# Altium PCB GPS-M2-NEO-M9N.PcbDoc
Units mm, origin at the board's own origin, x right, y up, seen from the top; angles counter-clockwise.
Board outline 22 x 42 mm, 4 copper layers (L01-Top Layer, L02-Inner Layer, L03-Inner Layer, L04-Bottom Layer), stack 0.76 mm thick; 40 components, 31 nets, 161 pads, 305 vias.
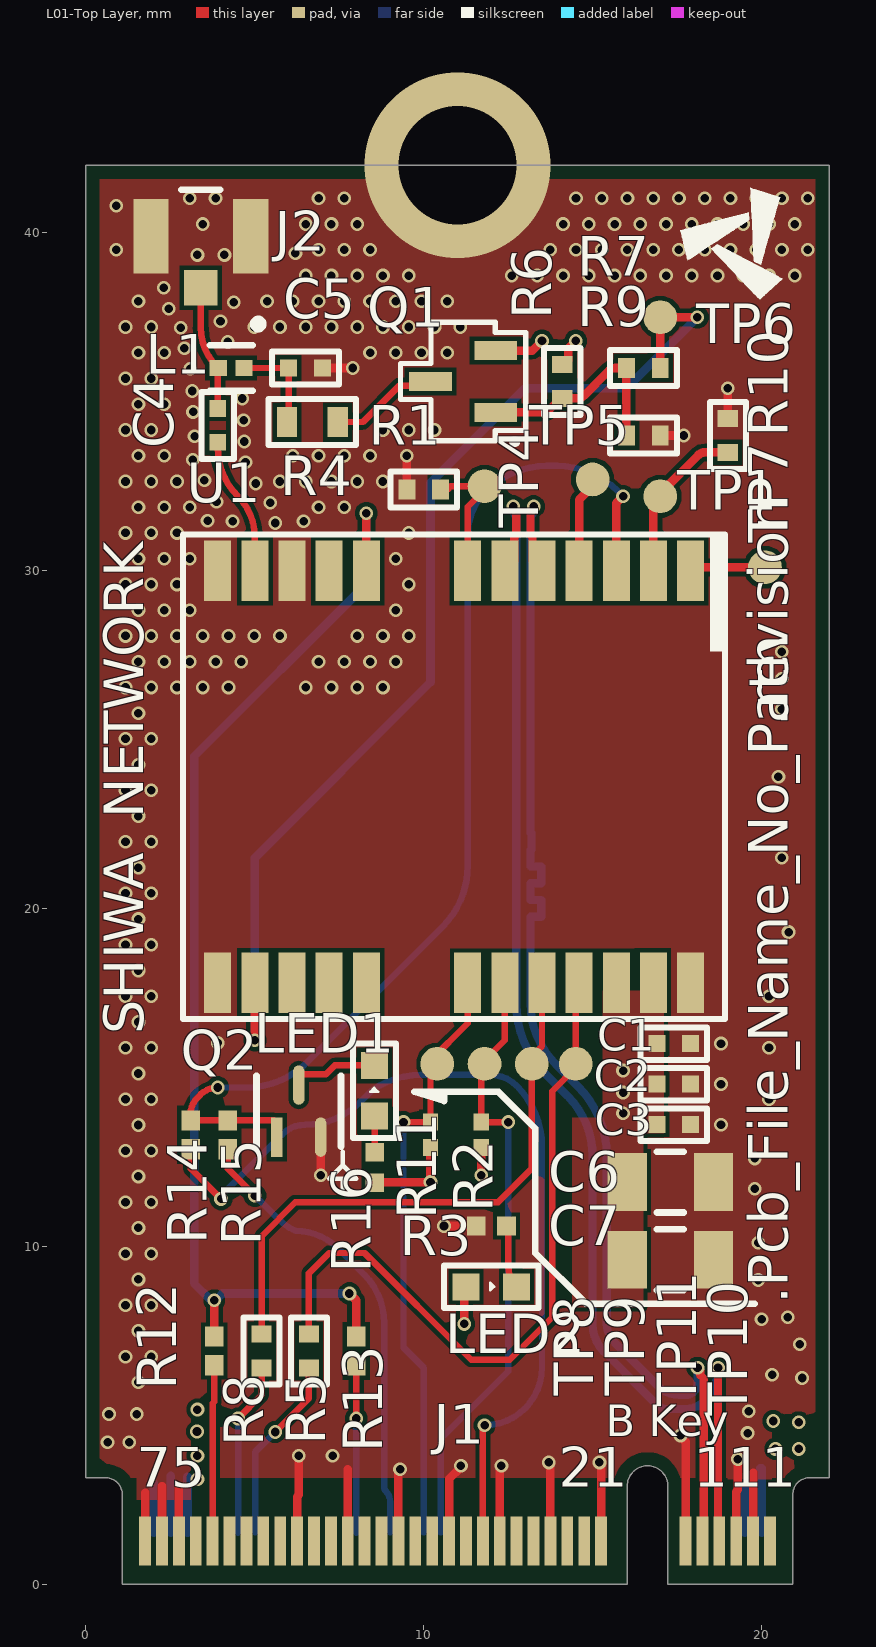
[diagram p0: L01-Top Layer view]
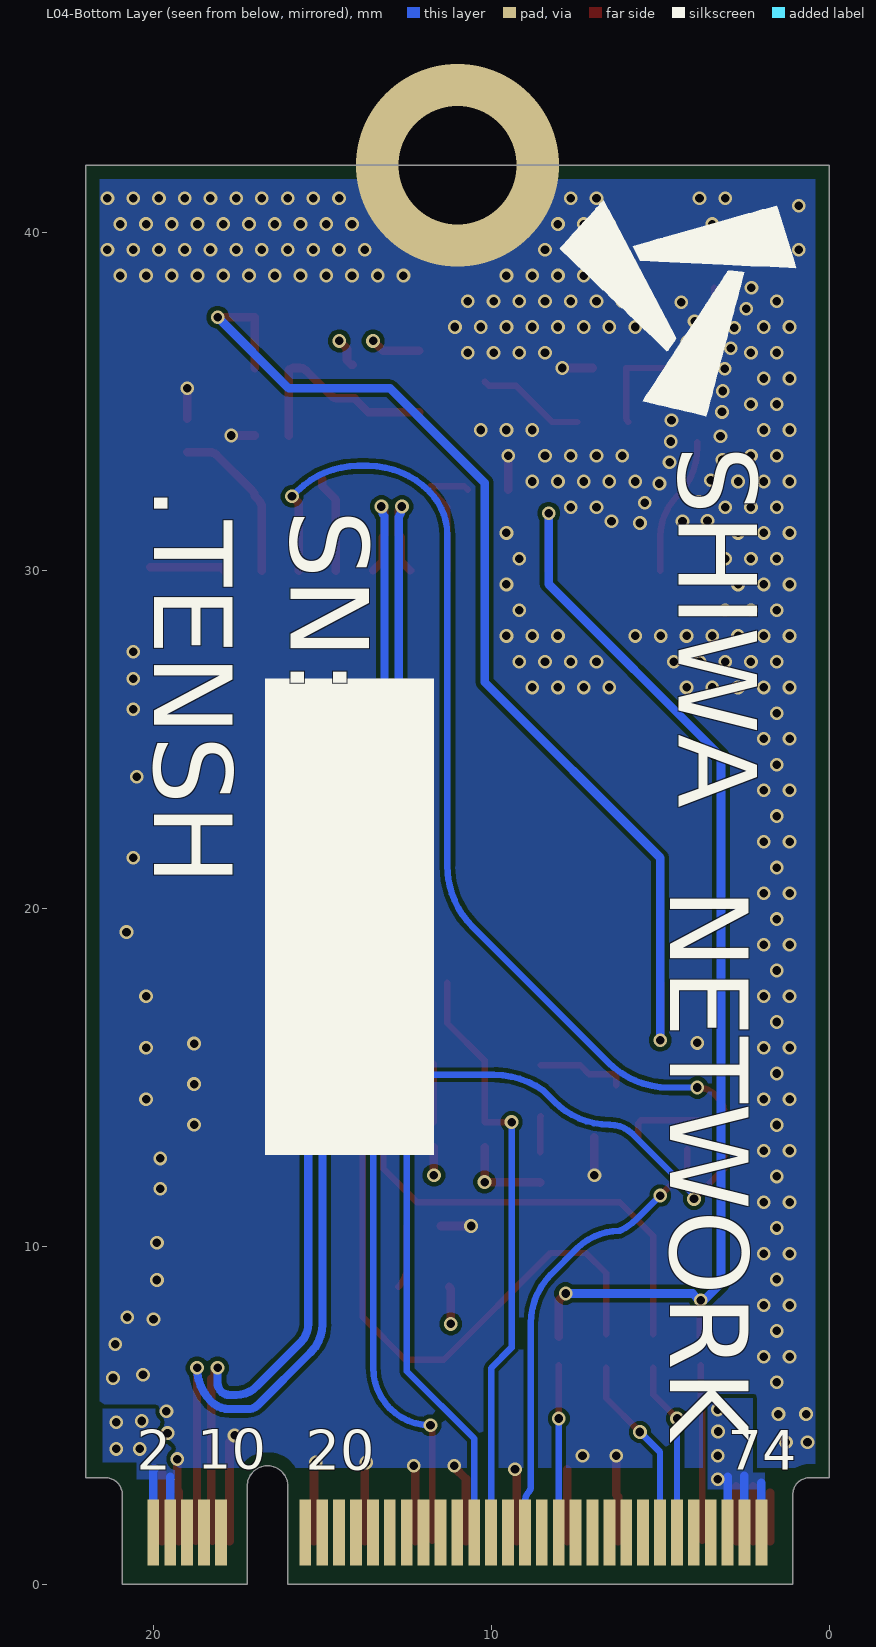
[diagram p1: L04-Bottom Layer view, seen from below]
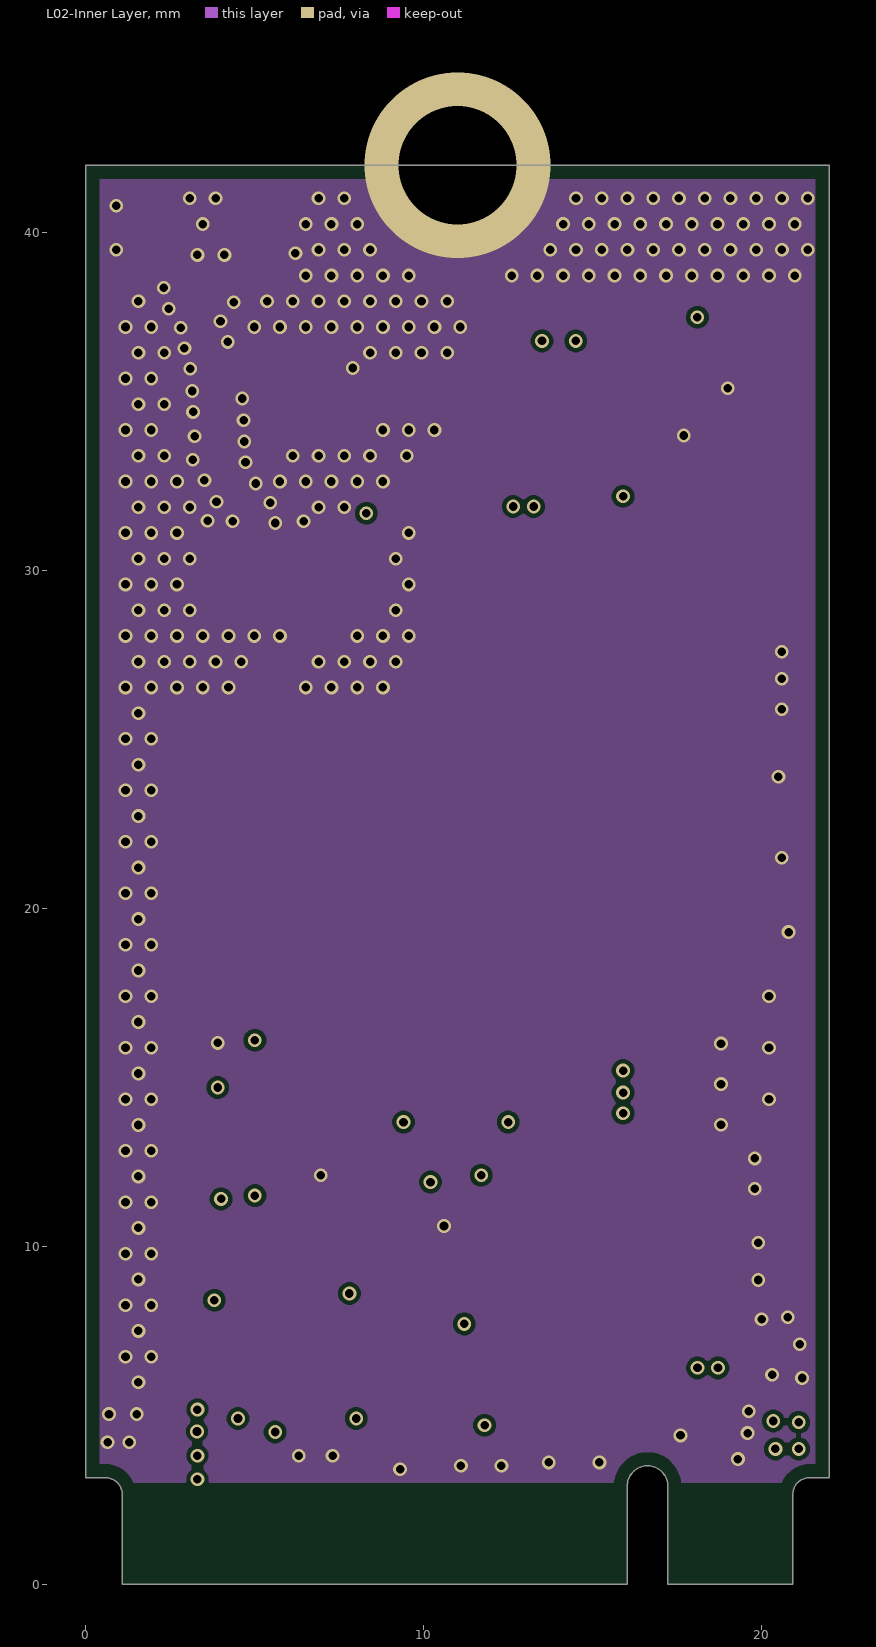
[diagram p2: L02-Inner Layer]
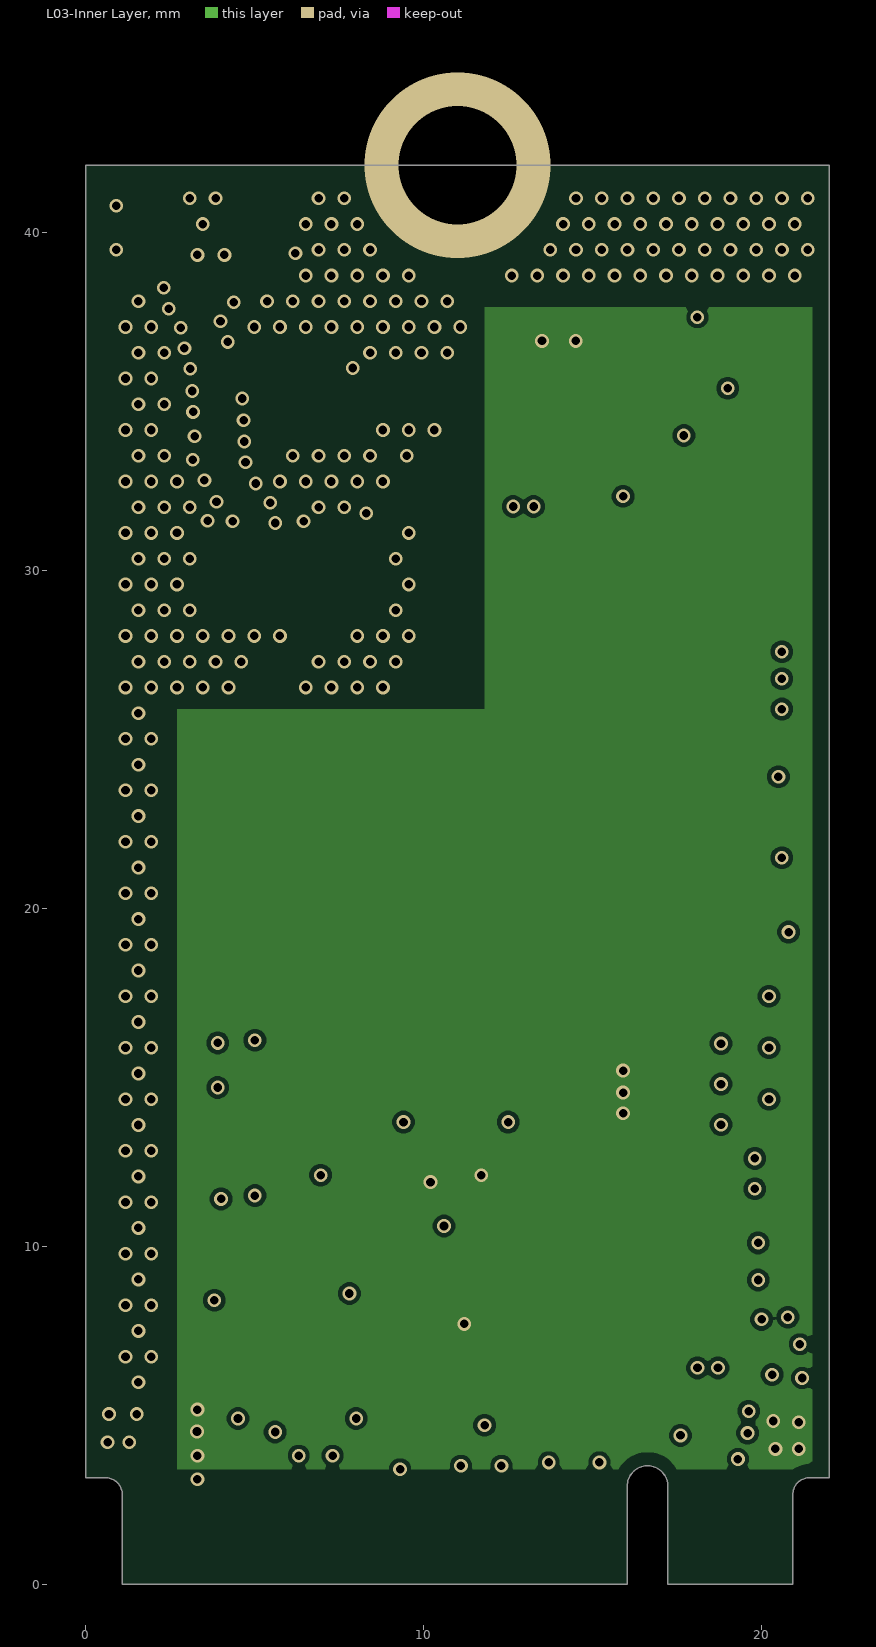
[diagram p3: L03-Inner Layer]
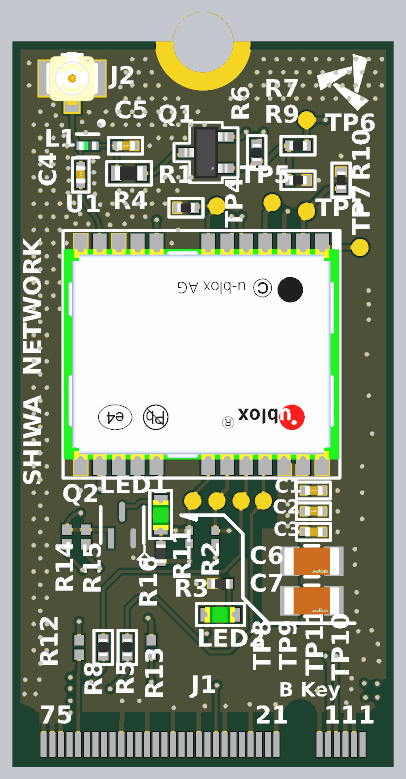
[diagram p4: 3D render of the assembled board from above, using the file's embedded part models]

## Layer stack, top to bottom
Top Solder: solder mask 0.0152, Solder Resist, Dk 3.9
L01-Top Layer: signal copper 0.035
Dielectric 1: prepreg 0.11, 2116, Dk 3.7
L02-Inner Layer: signal copper 0.035
Dielectric 2: core 0.4, FR4, Dk 4.04
L03-Inner Layer: signal copper 0.035
Dielectric 3: prepreg 0.11, 2116, Dk 3.7
L04-Bottom Layer: signal copper 0.035
Bottom Solder: solder mask 0.0152, Solder Resist, Dk 3.9

## Board outline
1.075,0 1.075,2.65 ccw(c0.575,2.65) 0.575,3.15 0,3.15 0,42 22,42 22,3.15 21.425,3.15 ccw(c21.425,2.65) 20.925,2.65 20.925,0 17.225,0 17.225,2.9 ccw(c16.625,2.9) 16.025,2.9 16.025,0

## Design rules (kind name [scope] priority, off if disabled: settings)
AcuteAngle [All] p1: minimum=6.00000000000000E+0001 checktracksonly=FALSE
BoardOutlineClearance [All] p1: gap=0.4 ignorepadtopadclearanceinfootprint=FALSE
Clearance Clearance_L1andL4_Copper [(InPolygon AND (OnLayer('Top Layer') OR OnLayer('Bottom Layer'))) vs (InDifferentialPairClass('All Differential Pairs'))] p1: gap=0.127 ignorepadtopadclearanceinfootprint=FALSE
Clearance [All] p2: gap=0.127 ignorepadtopadclearanceinfootprint=FALSE
ComponentClearance [All] p1: gap=0.4 collisioncheckmode=3 verticalgap=0.5 showdistances=FALSE
DiffPairsRouting 90_Ohm_L1andL4 [InDifferentialPairClass('90_Ohm')] p1: maxlimit=0.178 minlimit=0.178 mostfreqgap=0.178 toplayer_minwidth=0.241 toplayer_maxwidth=0.241 toplayer_prefwidth=0.241 midlayer1_minwidth=0.241 midlayer1_maxwidth=0.241 midlayer1_prefwidth=0.241 midlayer2_minwidth=0.241 midlayer2_maxwidth=0.241 midlayer2_prefwidth=0.241 bottomlayer_minwidth=0.241 bottomlayer_maxwidth=0.241 bottomlayer_prefwidth=0.241 maxuncoupledlength=5.08
DiffPairsRouting 100_Ohm_L1andL4 [InDifferentialPairClass('100_Ohm')] p2: maxlimit=0.178 minlimit=0.178 mostfreqgap=0.178 toplayer_minwidth=0.203 toplayer_maxwidth=0.203 toplayer_prefwidth=0.203 midlayer1_minwidth=0.203 midlayer1_maxwidth=0.203 midlayer1_prefwidth=0.203 midlayer2_minwidth=0.203 midlayer2_maxwidth=0.203 midlayer2_prefwidth=0.203 bottomlayer_minwidth=0.203 bottomlayer_maxwidth=0.203 bottomlayer_prefwidth=0.203 maxuncoupledlength=5.08
DiffPairsRouting 100_Ohm_Default [All] p3: maxlimit=0.254 minlimit=0.241 mostfreqgap=0.254 toplayer_maxgap=0.241 toplayer_prefgap=0.241 toplayer_minwidth=0.114 toplayer_maxwidth=0.114 toplayer_prefwidth=0.114 midlayer1_mingap=0.254 midlayer1_minwidth=0.381 midlayer1_maxwidth=0.381 midlayer1_prefwidth=0.381 midlayer2_mingap=0.254 midlayer2_minwidth=0.381 midlayer2_maxwidth=0.381 midlayer2_prefwidth=0.381 bottomlayer_maxgap=0.241 bottomlayer_prefgap=0.241 bottomlayer_minwidth=0.114 bottomlayer_maxwidth=0.114 bottomlayer_prefwidth=0.114 maxuncoupledlength=5.08
HoleSize [All] p1: absolutevalues=TRUE maxlimit=3 minlimit=0.15 maxpercent=80.000 minpercent=20.000
HoleToHoleClearance [All] p1: gap=0.3 allowstackedmicrovias=TRUE
MatchedLengths [InDifferentialPairClass('All Differential Pairs')] p1: tolerance=0.025 checknetsindiffpair=TRUE checkdiffpairvsdiffpair=FALSE checkxsignals=FALSE checkothers=FALSE
MinimumSolderMaskSliver [All] p1: minsoldermaskwidth=0.1 // 0.076mm for Green Soldermask, 0.1 for other color soldermask
PlaneClearance [All] p1: clearance=0.254
PolygonConnect [All] p1: connectstyle=Direct reliefconductorwidth=0.508 reliefentries=4 polygonreliefangle="90 Angle" airgapwidth=0.254
RoomDefinition 01-M2_NEO-M9N_MODULE [InComponentClass('01-M2_NEO-M9N_MODULE')] p1: confinementstyle=ConfineIn formatcopy=TRUE lockcomponents=FALSE outline 0.799,5.4 21.099,5.4 21.099,41.9 0.799,41.9
RoutingCorners [All] p1: cornerstyle=45-Degree minsetback=2.5 maxsetback=2.5
RoutingVias [All] p1: holewidth=0.254 width=0.406 viastyle="Through Hole" minholewidth=0.254 minwidth=0.406 maxholewidth=0.3 maxwidth=0.6
SilkToSilkClearance [All] p1: silktosilkclearance=0.1
SilkToSolderMaskClearance [IsPad] p1: minsilkscreentomaskgap=0.127 clearancetoexposedcopper=TRUE
SolderMaskExpansion [All] p1: expansion=0.05 istentingtop=FALSE
UnRoutedNet [All] p1: checkbadconnections=TRUE
Width [All] p1: maxlimit=2.54 minlimit=0.152 preferedwidth=0.191
20 further rules are at their usual default settings.

## Classes and differential pairs
component class 02-M2_GoldFingers: C6 C7 J1 R12 R13 R14 R15
component class 01-M2_NEO-M9N_MODULE: C1 C2 C3 C4 C5 J2 L1 LED1 LED2 Q1 Q2 R1 R2 R3 R4 R5 R6 R7 R8 R9 R10 R11 R16 TP1 TP4 TP5 TP6 TP7 TP8 TP9 TP10 TP11 U1

## Components (designator, comment, footprint, x,y, rotation, side; value= is the part's Value field where it differs from the comment)
C1 "1uF 6V3 0402" c0402 17.4,16 r180 top
C2 "100nF 10V 0402" c0402 17.4,14.8 r180 top
C3 "10nF 50V 0402" c0402 17.4,13.6 r180 top
C4 "47pF 50V 0402" c0402 3.9,34.3 r270 top
C5 "10nF 50V 0402" c0402 6.5,36 r180 top
C6 "47uF_6.3V_1206" FP-GRM31C-0_2-e0_3_0_8-IPC_C 17.3,11.9 r0 top
C7 "47uF_6.3V_1206" FP-GRM31C-0_2-e0_3_0_8-IPC_C 17.3,9.6 r0 top
J1 "OCPTAP_M2_FINGERS" "OCPTAP M2 FINGERS" 20.25,1.275 r0 top locked
J2 "U.FL-R-SMT-1(10)" FP-U_FL-R-SMT-1_10-MFG 3.4,39.9 r180 top
L1 "27nH 350mA 0.46ohm 0402" FP-LQG15HH_02-IPC_C 4.3,36 r180 top
LED1 "Green" led0603 8.538,14.604 r90 top
LED2 "Green" led0603 12,8.8 r0 top
Q1 "DMG2302UKQ-7" SOT23 11.165,35.6 r90 top
Q2 "2N7002W" FP-419AB-01-IPC_C 6.3,14 r90 top
R1 "0 ohm 0402" r0402 10,32.4 r180 top
R2 "10K_5%_0402" RESC1005X40X25LL05T10 11.7,13.3 r270 top
R3 "1K_1%_0402" RESC1005X40X25NL05T05 12,10.6 r0 top
R4 "10 OHM 1/4W 0603" r0603 6.7,34.4 r180 top
R5 "0 ohm 0402" r0402 6.6,6.9 r270 top
R6 "DNI 0 ohm 0402" r0402 14.1,35.6 r90 top
R7 "0 ohm 0402" r0402 16.5,36 r180 top
R8 "0 ohm 0402" r0402 5.2,6.9 r270 top
R9 "DNI 0 ohm 0402" r0402 16.5,34 r0 top
R10 "DNI 0 ohm 0402" r0402 19,34 r270 top
R11 "10K_5%_0402" RESC1005X40X25LL05T10 10.2,13.3 r270 top
R12 "0_5%_0402" RESC1005X40X25NL05T10 3.8,6.9 r270 top
R13 "0_5%_0402" RESC1005X40X25NL05T10 8,6.9 r270 top
R14 "DNI_0_5%_0402" RESC1005X40X25NL05T10 3.1,13.3 r90 top
R15 "0_5%_0402" RESC1005X40X25NL05T10 4.2,13.3 r90 top
R16 "1K_1%_0402" RESC1005X40X25NL05T05 8.552,12.336 r270 top
TP1 "1MM" TP1MM 17,32.2 r0 top
TP4 "1MM" TP1MM 11.8,32.5 r0 top
TP5 "1MM" TP1MM 15,32.7 r0 top
TP6 "1MM" TP1MM 17,37.5 r0 top
TP7 "1MM" TP1MM 20.1,30.1 r0 top
TP8 "1MM" TP1MM 10.4,15.4 r0 top
TP9 "1MM" TP1MM 11.8,15.4 r0 top
TP10 "1MM" TP1MM 14.5,15.4 r90 top
TP11 "1MM" TP1MM 13.2,15.4 r90 top
U1 "NEO-M9N-00B" IC_NEO-M9N 10.9,23.9 r90 top

## Footprints (in the part's own frame and the unit in brackets; to place one, negate y for a bottom-side part, rotate by r counter-clockwise, add the part's x,y. Pads: shape width x height; smd on the part's side, far side on the other; paste and mask are expansions set on the pad)
c0402 [mm]
  rect 0.5x0.5 smd: 1(-0.5,0) 2(0.5,0)
  silkscreen extent -0.99,-0.48 0.99,0.48, body extent -0.55,-0.28 0.5,0.27, height 0.56
FP-419AB-01-IPC_C [mm]
  rect 1.164x0.336 smd paste+0 mask+0: 1(-0.77,0.65)
  rrect100% 1.164x0.336 smd paste+0 mask+0: 2(-0.77,-0.65) 3(0.77,0)
  silkscreen extent -1.05,-1.25 1.05,1.25
FP-GRM31C-0_2-e0_3_0_8-IPC_C [mm]
  rect 1.155x1.706 smd paste+0 mask+0: 1(-1.276,0) 2(1.276,0)
  silkscreen extent -0.4,-0.9 0.4,0.9, body extent -1.95,-1 1.95,1, height 0.25
FP-LQG15HH_02-IPC_C [mm]
  rect 0.515x0.472 smd paste+0 mask+0: 1(-0.379,0) 2(0.379,0)
  silkscreen extent -0.93,-1.42 0.64,0.67, body extent -0.74,-0.38 0.74,0.38, height 0.25
FP-U_FL-R-SMT-1_10-MFG [mm]
  rect 1x1.05 smd paste-1000 mask+0: 1(0,1.525)
  rect 1.05x2.2 smd paste-1000 mask+0: 2(-1.475,0) 3(1.475,0)
  silkscreen extent -0.58,-1.38 0.58,-1.38, body extent -2.1,-1.48 2.1,2.15, height 0.25
IC_NEO-M9N [mil]
  rect 70.8x31.5 smd paste-99999: 1(240.15,-275.55) 2(240.15,-232.25) 3(240.15,-188.95) 4(240.15,-145.65) 5(240.15,-102.35) 6(240.15,-59.05) 7(240.15,-15.75) 8(240.15,102.35) 9(240.15,145.65) 10(240.15,188.95) 11(240.15,232.25) 12(240.15,275.55) 13(-240.15,275.55) 14(-240.15,232.25) 15(-240.15,188.95) 16(-240.15,145.65) 17(-240.15,102.35) 18(-240.15,-15.75) 19(-240.15,-59.05) 20(-240.15,-102.35) 21(-240.15,-145.65) 22(-240.15,-188.95) 23(-240.15,-232.25) 24(-240.15,-275.55)
  silkscreen extent -282,-316 282,316, body extent -240,-315 240,315, height 91
led0603 [mm]
  rect 0.8x0.8 smd: 1(-0.75,0) 2(0.75,0)
  silkscreen extent -1.4,-0.64 1.4,0.64, body extent -0.88,-0.44 0.82,0.46, height 0.9
"OCPTAP M2 FINGERS" [mm]
  rect 0.35x1.45 smd: 1(0,0) 3(-0.5,0) 5(-1,0) 7(-1.5,0) 9(-2,0) 11(-2.5,0) 21(-5,0) 23(-5.5,0) 25(-6,0) 27(-6.5,0) 29(-7,0) 31(-7.5,0) 33(-8,0) 35(-8.5,0) 37(-9,0) 39(-9.5,0) 41(-10,0) 43(-10.5,0) 45(-11,0) 47(-11.5,0) 49(-12,0) 51(-12.5,0) 53(-13,0) 55(-13.5,0) 57(-14,0) 59(-14.5,0) 61(-15,0) 63(-15.5,0) 65(-16,0) 67(-16.5,0) 69(-17,0) 71(-17.5,0) 73(-18,0) 75(-18.5,0)
  rect 0.35x1.95 smd far side: 2(-0.244,0.25) 4(-0.744,0.25) 6(-1.244,0.25) 8(-1.744,0.25) 10(-2.244,0.25) 20(-4.744,0.25) 22(-5.244,0.25) 24(-5.744,0.25) 26(-6.244,0.25) 28(-6.744,0.25) 30(-7.244,0.25) 32(-7.744,0.25) 34(-8.244,0.25) 36(-8.744,0.25) 38(-9.244,0.25) 40(-9.744,0.25) 42(-10.244,0.25) 44(-10.744,0.25) 46(-11.244,0.25) 48(-11.744,0.25) 50(-12.244,0.25) 52(-12.744,0.25) 54(-13.244,0.25) 56(-13.744,0.25) 58(-14.244,0.25) 60(-14.744,0.25) 62(-15.244,0.25) 64(-15.744,0.25) 66(-16.244,0.25) 68(-16.744,0.25) 70(-17.244,0.25) 72(-17.744,0.25) 74(-18.244,0.25)
r0402 [mm]
  rect 0.5x0.6 smd: 1(-0.5,0) 2(0.5,0)
  silkscreen extent -0.99,-0.53 0.99,0.53, body extent -0.5,-0.25 0.5,0.25, height 0.36
r0603 [mm]
  rect 0.6x0.9 smd: 1(-0.75,0) 2(0.75,0)
  silkscreen extent -1.3,-0.69 1.3,0.69, body extent -0.79,-0.4 0.81,0.4, height 0.46
RESC1005X40X25LL05T10 [mm] "Chip Resistor, 2-Leads, Body 1.00x0.50mm, IPC High Density"
  rect 0.5x0.45 smd: 1(-0.375,0) 2(0.375,0)
  body extent -0.53,-0.27 0.53,0.28, height 0.4
RESC1005X40X25NL05T05 [mm] "Chip Resistor, 2-Leads, Body 1.05x0.55mm, IPC Medium Density"
  rect 0.55x0.55 smd: 1(-0.45,0) 2(0.45,0)
  body extent -0.53,-0.28 0.53,0.28, height 0.4
RESC1005X40X25NL05T10 [mm] "Chip Resistor, 2-Leads, Body 1.00x0.50mm, IPC Medium Density"
  rect 0.6x0.55 smd: 1(-0.425,0) 2(0.425,0)
  body extent -0.53,-0.27 0.53,0.28, height 0.4
SOT23 [mil]
  rect 22x50 smd: 1(-36.02,-38) 2(36.02,-38) 3(0,38)
  silkscreen extent -73,-73 69,73, body extent -59,-49 59,49, height 43
TP1MM [mm] "Test Point 1MM diameter"
  round 1 smd paste-100: 1(0,0)

## Part data
C1: library part "CAP CER 1UF 6.3V X7R 0402", "0402 1 uF 6.3 V ±10% Tolerance X7R Multilayer Ceramic Capacitor", Capacitance=1uF, Case Code (Imperial)=0402, Case Code (Metric)=1005, Dielectric=X7R, Manufacturer=Murata, Manufacturer Part Number=GRM155R70J105KA12J, Max Operating Temperature=125°C, Min Operating Temperature=-55°C, Package Quantity=50000, Supplier Part Number 1=490-13339-1-ND, Tolerance=10%, Voltage Rating=6.3V, Case/Package=0402, CATEGORY="Ceramic Capacitors", componentlink1description=http://www.mouser.com/ds/2/281/c02e-2905.pdf?src-supplier=Mouser, componentlink1url=http://www.mouser.com/ds/2/281/c02e-2905.pdf?src-supplier=Mouser, componentlink2description=http://search.murata.co.jp/Ceramy/image/img/A01X/G101/ENG/GRM155R70J105KA12-01.pdf?src-supplier=Digi-Key, componentlink2url=http://search.murata.co.jp/Ceramy/image/img/A01X/G101/ENG/GRM155R70J105KA12-01.pdf?src-supplier=Digi-Key, Length=0.039inch, Mount="Surface Mount", packaging="Tape and Reel", Pricing 1="1=0.10000, 10=0.07300, 50=0.04000, 100=0.03270, 500=0.02334, 1000=0.01833, 2500=0.01666, 5000=0.01533 (USD)", RoHS=Yes, RoHS Compliant=Yes, Stock 1=7275801, Supplier 1=Digi-Key, Termination=SMD/SMT, Thickness=0.022inch, Voltage Rating (DC)=6.3V, Weight=0.000212oz, Width=0.02inch
C2: library part "CAP CER 0.1UF 10V X7R 0402", "CL05 Series 0.1 uF 10 V ±10 % Tolerance X7R SMT Multilayer Ceramic Capacitor", Capacitance=100nF, Case Code (Imperial)=0402, Case Code (Metric)=1005, Dielectric=X7R, Manufacturer=Samsung, Manufacturer Part Number=CL05B104KP5NNNC, Max Operating Temperature=125°C, Min Operating Temperature=-55°C, Package Quantity=1, Supplier Part Number 1=1276-1002-1-ND, Tolerance=10%, Voltage Rating=10V, Case/Package=0402, CATEGORY="Ceramic Capacitors", componentlink1description=https://datasheet.ciiva.com/15165/getdatasheetpartid-37100-15165107.pdf?src-supplier=Verical, componentlink1url=https://datasheet.ciiva.com/15165/getdatasheetpartid-37100-15165107.pdf?src-supplier=Verical, componentlink2description=https://datasheet.ciiva.com/16498/cl05b104kq5nnnc-16498491.pdf?src-supplier=Future+Electronics, componentlink2url=https://datasheet.ciiva.com/16498/cl05b104kq5nnnc-16498491.pdf?src-supplier=Future+Electronics, Construction=Flat, Contact Plating=Tin, Depth=0.5mm, Height=0.5mm, Length=1mm, Mount="Surface Mount", packaging="Tape and Reel", Pricing 1="1=0.10000, 10=0.02400, 50=0.01300, 100=0.01050, 500=0.00752, 1000=0.00592, 2500=0.00538, 5000=0.00495 (USD)", Radiation Hardening=No, RoHS=Yes, RoHS Compliant=Yes, series=CL, Stock 1=36338332, Supplier 1=Digi-Key, Thickness=0.022inch, Width=0.02inch
C3 C5: library part "CAP CER 10000PF 50V X7R 0402", "CAP CER 10000PF 50V X7R 0402", Capacitance=10nF, Case Code (Imperial)=0402, Case Code (Metric)=1005, Dielectric=X7R, Manufacturer=Murata, Manufacturer Part Number=GCM155R71H103KA55D, Max Operating Temperature=125°C, Min Operating Temperature=-55°C, Package Quantity=1, Ratings=AEC-Q200, Supplier Part Number 1=490-4762-1-ND, Tolerance=10%, Voltage=50V, Case/Package=0402, CATEGORY="Ceramic Capacitors", componentlink1description=https://datasheet.ciiva.com/130/product-130683.pdf?src-supplier=Digi-Key, componentlink1url=https://datasheet.ciiva.com/130/product-130683.pdf?src-supplier=Digi-Key, componentlink2description=https://datasheet.ciiva.com/130/product-130682.pdf?src-supplier=Digi-Key, componentlink2url=https://datasheet.ciiva.com/130/product-130682.pdf?src-supplier=Digi-Key, ComponentLink3Description=https://datasheet.ciiva.com/130/product-130684.pdf?src-supplier=Digi-Key, ComponentLink3URL=https://datasheet.ciiva.com/130/product-130684.pdf?src-supplier=Digi-Key, ComponentLink4Description=https://datasheet.ciiva.com/11787/0900766b80ef92d0-11787082.pdf?src-supplier=RSComponents, ComponentLink4URL=https://datasheet.ciiva.com/11787/0900766b80ef92d0-11787082.pdf?src-supplier=RSComponents, ComponentLink5Description=https://datasheet.ciiva.com/16199/product-16199584.pdf?src-supplier=Future+Electronics, ComponentLink5URL=https://datasheet.ciiva.com/16199/product-16199584.pdf?src-supplier=Future+Electronics, ComponentLink6Description=https://datasheet.ciiva.com/18100/getdatasheetpartid-27433-18100656.pdf?src-supplier=Verical, ComponentLink6URL=https://datasheet.ciiva.com/18100/getdatasheetpartid-27433-18100656.pdf?src-supplier=Verical, ComponentLink7Description=https://datasheet.ciiva.com/2989/product-2989235.pdf?src-supplier=Avnet, ComponentLink7URL=https://datasheet.ciiva.com/2989/product-2989235.pdf?src-supplier=Avnet, Construction=Flat, Depth=0.5mm, Height=0.5mm, Lead Free="Lead Free", Length=1mm, Mount="Surface Mount", packaging="Tape and Reel", Pricing 1="1=0.10000, 10=0.02700, 50=0.01460, 100=0.01190, 500=0.00848, 1000=0.00667, 2500=0.00606, 5000=0.00558 (USD)", Radiation Hardening=No, REACH SVHC="No SVHC", RoHS=Yes, RoHS Compliant=Yes, series=GCM, Stock 1=16109194, Supplier 1=Digi-Key, Termination=SMD/SMT, Thickness=0.022inch, Voltage Rating=50V, Voltage Rating (DC)=50V, Width=0.02inch
C4: library part "CAP CER 47PF 50V C0G/NPO 0402", "0402 47 pF 50 V ±5 % Tolerance NP0 SMT Multilayer Ceramic Capacitor", Capacitance=47pF, Case Code (Imperial)=0402, Case Code (Metric)=1005, Dielectric=C0G, Dielectric Material=Ceramic, Insulation Resistance=100GR, Manufacturer=Yageo, Manufacturer Part Number=CC0402JRNPO9BN470, Max Operating Temperature=125°C, Min Operating Temperature=-55°C, Package Quantity=1, Supplier Part Number 1=311-1021-1-ND, Tolerance=5%, Voltage=50V, Case/Package=0402, CATEGORY="Ceramic Capacitors", componentlink1description=https://datasheet.ciiva.com/28450/1443161-28450267.pdf?src-supplier=Element14, componentlink1url=https://datasheet.ciiva.com/28450/1443161-28450267.pdf?src-supplier=Element14, componentlink2description=https://datasheet.ciiva.com/8033/1443161-8033638.pdf?src-supplier=Element14, componentlink2url=https://datasheet.ciiva.com/8033/1443161-8033638.pdf?src-supplier=Element14, ComponentLink3Description=https://datasheet.ciiva.com/8033/1443161-8033637.pdf?src-supplier=Element14, ComponentLink3URL=https://datasheet.ciiva.com/8033/1443161-8033637.pdf?src-supplier=Element14, ComponentLink4Description=https://datasheet.ciiva.com/161/mlccorderingcode-161493.pdf?src-supplier=Digi-Key, ComponentLink4URL=https://datasheet.ciiva.com/161/mlccorderingcode-161493.pdf?src-supplier=Digi-Key, ComponentLink5Description=https://datasheet.ciiva.com/161/mlccorderingcode-161492.pdf?src-supplier=Digi-Key, ComponentLink5URL=https://datasheet.ciiva.com/161/mlccorderingcode-161492.pdf?src-supplier=Digi-Key, ComponentLink6Description=https://datasheet.ciiva.com/161/mlccorderingcode-161494.pdf?src-supplier=Digi-Key, ComponentLink6URL=https://datasheet.ciiva.com/161/mlccorderingcode-161494.pdf?src-supplier=Digi-Key, Depth=0.5mm, Height=0.5mm, Lead Free="Lead Free", Length=1mm, Mount="Surface Mount", Number of Pins=2, packaging="Tape and Reel", Pricing 1="1=0.10000, 10=0.01800, 50=0.01000, 100=0.00820, 500=0.00584, 1000=0.00458, 2500=0.00417, 5000=0.00383 (USD)", Radiation Hardening=No, REACH SVHC="No SVHC", Resistor Type=Ceramic, RoHS=Yes, RoHS Compliant=Yes, series=CC, Stock 1=4278982, Supplier 1=Digi-Key, Termination=SMD/SMT, Thickness=0.022inch, Voltage Rating=50V, Voltage Rating (DC)=50V, Weight=2.3E-05oz, Width=0.02inch
C6 C7: library part CMP-2000-06344-2, "Chip Multilayer Ceramic Capacitors for General Purpose, 1206, 47uF, X5R, 15%, 20%, 6.3V", Capacitance=47uF, Case Code (Imperial)=1206, Case Code (Metric)=3216, Dielectric=X5R, Max Operating Temperature=85°C, Min Operating Temperature=-55°C, Package Quantity=2000, Tolerance=20%, Voltage=6.3V, Case/Package=1206, Depth=1.6mm, Height=1.6mm, Lead Free="Lead Free", Length=3.2mm, Material=Ceramic, Mount="Surface Mount", packaging="Tape and Reel", Radiation Hardening=No, REACH SVHC="No SVHC", Termination=SMD/SMT, Thickness=0.071inch, Voltage Rating=6.3V, Voltage Rating (DC)=6.3V, Width=0.063inch
J2: library part CMP-2000-05152-3, "CONN U.FL RCPT STR 50 OHM SMD", Dielectric Material=Polymer, Frequency=6GHz, Housing Color=Beige, Insulation Resistance=500MR, Max Operating Temperature=90°C, Min Operating Temperature=-40°C, Package Quantity=2500, Body Material=Bronze, Body Plating=Silver, Connector Type=Coaxial, Contact Material=Brass, Contact Plating=Gold, Depth=3.1mm, Fastening Type=Snap, Gender=Male, Impedance=50R, Lead Free="Lead Free", Length=3mm, Max Frequency=6GHz, Mount="Surface Mount", Orientation=Straight, packaging="Cut Tape", Radiation Hardening=No, REACH SVHC="No SVHC", series=U.FL, Termination=Solder, Weight=0.001764oz, Wire/Cable Type=Coaxial
L1: library part CMP-2000-06578-2, "Multilayer type RF Inductor 27nH ±5% 0.46Ω 350mA 0402", Case Code (Imperial)=0402, Case Code (Metric)=1005, Current Rating=300mA, DC Resistance (DCR)=460mR, Inductance=27nH, Inductance Tolerance=5%, Manufacturer Part Number=LQG15HS27NJ02D, Max Operating Temperature=125°C, Min Operating Temperature=-55°C, Package Quantity=10000, Self Resonant Frequency=1.7GHz, Test Frequency=100MHz, Case/Package=0402, Core Material=Air, DC Current=300mA, Depth=0.55mm, Height=0.5mm, Height - Seated (Max)=0.022inch, Lead Free="Lead Free", Length=1mm, Max DC Current=300mA, Military Standard=Not, Mount="Surface Mount", packaging="Tape and Reel", Q Factor=8, REACH SVHC="No SVHC", Shielding=Unshielded, Termination=SMD/SMT, Tolerance=5%, Width=0.02inch
LED1 LED2: library part "LED GREEN CLEAR CHIP SMD", "LED High-Power Uni-Color Green 574nm 2-Pin Chip LED T/R", Case Code (Imperial)=0603, Case Code (Metric)=1608, Forward Current=30mA, Forward Voltage=2V, Lens Color=Colorless, Manufacturer="Vishay Lite-On", Manufacturer Part Number=LTST-C190KGKT, Max Operating Temperature=85°C, Min Operating Temperature=-55°C, Package Quantity=1, Power Dissipation=75mW, Reverse Voltage=5V, Supplier Part Number 1=160-1435-1-ND, Test Current=20mA, Case/Package=0603, CATEGORY=LEDs, Color=Green, componentlink1description=https://datasheet.ciiva.com/11774/0900766b80dc02a8-11774060.pdf?src-supplier=RSComponents, componentlink1url=https://datasheet.ciiva.com/11774/0900766b80dc02a8-11774060.pdf?src-supplier=RSComponents, componentlink2description=https://datasheet.ciiva.com/12403/100-ltst-c190kgkt-63268-12403899.pdf?src-supplier=Mouser, componentlink2url=https://datasheet.ciiva.com/12403/100-ltst-c190kgkt-63268-12403899.pdf?src-supplier=Mouser, ComponentLink3Description=https://datasheet.ciiva.com/15117/getdatasheetpartid-141494-15117731.pdf?src-supplier=Verical, ComponentLink3URL=https://datasheet.ciiva.com/15117/getdatasheetpartid-141494-15117731.pdf?src-supplier=Verical, ComponentLink4Description=https://datasheet.ciiva.com/2109/s-110-ltst-c190kgkt-2109989.pdf?src-supplier=Digi-Key, ComponentLink4URL=https://datasheet.ciiva.com/2109/s-110-ltst-c190kgkt-2109989.pdf?src-supplier=Digi-Key, ComponentLink5Description=https://datasheet.ciiva.com/2109/s-110-ltst-c190kgkt-2109988.pdf?src-supplier=Digi-Key, ComponentLink5URL=https://datasheet.ciiva.com/2109/s-110-ltst-c190kgkt-2109988.pdf?src-supplier=Digi-Key, ComponentLink6Description=https://datasheet.ciiva.com/2109/s-110-ltst-c190kgkt-2109990.pdf?src-supplier=Digi-Key, ComponentLink6URL=https://datasheet.ciiva.com/2109/s-110-ltst-c190kgkt-2109990.pdf?src-supplier=Digi-Key, Depth=0.8mm, Dominant Wavelength=571nm, Height=0.8mm, Illumination Color=Green, Lead Free="Lead Free", Length=1.6mm, Lens Style=Diffused,Colorless,Rectangular,Clear, Lens Transparency=Clear, Luminous Intensity=35mcd, Mount="Surface Mount", Number of Elements=1, Number of LEDs=1, Number of Pins=2, packaging="Tape and Reel", Power Rating=75mW, Pricing 1="1=0.24000, 10=0.13200, 100=0.06110, 500=0.05640, 1000=0.04418, 2000=0.04324 (USD)", Radiation Hardening=No, RoHS=Yes, RoHS Compliant=Yes, Stock 1=1803324, Supplier 1=Digi-Key, Viewing Angle=130°, Wavelength=574nm, Width=0.8mm
Q1: "N-Channel 20 V 2.8A (Ta) 660mW (Ta) Surface Mount SOT-23-3", Case/Package=SOT-23, Continuous Drain Current (ID)=2.8A, Drain to Source Voltage (Vdss)=20V, Input Capacitance=130pF, Manufacturer=Diodes, Max Operating Temperature=150°C, Max Power Dissipation=660mW, Mfr_Name="Diodes Inc", Min Operating Temperature=-55°C, Supplier Part Number 1=31-DMG2302UKQ-7CT-ND, Copyright="Copyright (C) 2022 Ultra Librarian. All rights reserved.", Digi-Key_Part_Number_1=31-DMG2302UKQ-7TR-ND, Digi-Key_Part_Number_2=31-DMG2302UKQ-7CT-ND, Digi-Key_Part_Number_3=31-DMG2302UKQ-7DKR-ND, Manufacturer Part Number=DMG2302UKQ-7, Manufacturer_Part_Number=DMG2302UKQ-7, Mount="Surface Mount", packaging="Tape and Reel", Pricing 1="1=0.48000, 10=0.36000, 100=0.22400, 500=0.15330, 1000=0.11792 (USD)", Rds On Max=90mR, RefDes=RefDes, RoHS=Yes, Stock 1=997695, Supplier 1=Digi-Key, Type=DEV
Q2: library part CMP-07173-000098-1, "MOSFET N-CH 60V 115MA SOT-323", Case/Package=SOT-323, Continuous Drain Current (ID)=115mA, Drain to Source Breakdown Voltage=60V, Drain to Source Resistance=7.5R, Gate to Source Voltage (Vgs)=20V, Input Capacitance=50pF, Max Operating Temperature=150°C, Max Power Dissipation=200mW, Min Operating Temperature=-55°C, Package Quantity=1, Threshold Voltage=1.76V, Contact Plating=Tin, Drain to Source Voltage (Vdss)=60V, Element Configuration=Single, Height=1mm, Lead Free="Lead Free", Length=2mm, Mount="Surface Mount", Number of Elements=1, Number of Pins=3, On-State Resistance=7.5R, packaging="Tape and Reel", Power Dissipation=200mW, Radiation Hardening=No, Rds On Max=7.5R, REACH SVHC="No SVHC", Turn-Off Delay Time=12.5ns, Turn-On Delay Time=5.85ns, Weight=0.03g, Width=1.25mm
R1 R5 R6 R7 R8 R9 R10: library part "RES 0 OHM JUMPER 1/16W 0402", "RES SMD 0 OHM JUMPER 1/16W 0402", Case Code (Imperial)=0402, Case Code (Metric)=1005, Manufacturer=Yageo, Manufacturer Part Number=RC0402JR-070RL, Max Operating Temperature=155°C, Max Power Dissipation=63mW, Min Operating Temperature=-55°C, Package Quantity=1, Power Rating=62.5mW, Resistance=0mR, Resistance Tolerance=5%, Resistor Type="Thick Film", Supplier Part Number 1=311-0.0JRCT-ND, Temperature Coefficient=200ppm/°C, Voltage Rating=50V, Case/Package=0402, CATEGORY="Chip SMD Resistors", componentlink1description=https://datasheet.ciiva.com/2452/pyu-rc0402-51-rohs-l-6-2452608.pdf?src-supplier=Digi-Key, componentlink1url=https://datasheet.ciiva.com/2452/pyu-rc0402-51-rohs-l-6-2452608.pdf?src-supplier=Digi-Key, componentlink2description=https://datasheet.ciiva.com/11808/0900766b80c66297-11808195.pdf?src-supplier=RSComponents, componentlink2url=https://datasheet.ciiva.com/11808/0900766b80c66297-11808195.pdf?src-supplier=RSComponents, ComponentLink3Description=https://datasheet.ciiva.com/7983/1018594-7983535.pdf?src-supplier=Element14, ComponentLink3URL=https://datasheet.ciiva.com/7983/1018594-7983535.pdf?src-supplier=Element14, ComponentLink4Description=https://datasheet.ciiva.com/22747/1018594-22747515.pdf?src-supplier=Element14, ComponentLink4URL=https://datasheet.ciiva.com/22747/1018594-22747515.pdf?src-supplier=Element14, ComponentLink5Description=https://datasheet.ciiva.com/2452/pyu-r-int-thick-7-2452609.pdf?src-supplier=Digi-Key, ComponentLink5URL=https://datasheet.ciiva.com/2452/pyu-r-int-thick-7-2452609.pdf?src-supplier=Digi-Key, ComponentLink6Description=https://datasheet.ciiva.com/2452/pyu-r-int-thick-7-2452610.pdf?src-supplier=Digi-Key, ComponentLink6URL=https://datasheet.ciiva.com/2452/pyu-r-int-thick-7-2452610.pdf?src-supplier=Digi-Key, ComponentLink7Description=https://datasheet.ciiva.com/8896/pyu-rc0402-51-rohs-l-6-8896201.pdf?src-supplier=Avnet, ComponentLink7URL=https://datasheet.ciiva.com/8896/pyu-rc0402-51-rohs-l-6-8896201.pdf?src-supplier=Avnet, ComponentLink8Description=https://datasheet.ciiva.com/15189/getdatasheetpartid-326379-15189533.pdf?src-supplier=Verical, ComponentLink8URL=https://datasheet.ciiva.com/15189/getdatasheetpartid-326379-15189533.pdf?src-supplier=Verical, Construction=Rectangular, Contact Plating=Tin,Matte, Depth=0.5mm, Features="Moisture Resistant", Height=0.016inch, Lead Free="Lead Free", Length=1mm, Military Standard=Not, Number of Terminations=2, packaging="Tape and Reel", Pricing 1="1=0.10000, 10=0.01200, 25=0.00840, 50=0.00640, 100=0.00480, 250=0.00364, 500=0.00290, 1000=0.00214, 5000=0.00154 (USD)", Radiation Hardening=No, REACH SVHC=Unknown, RoHS=Yes, RoHS Compliant=Yes, series=RC, Size Code=0402, Stock 1=45165868, Supplier 1=Digi-Key, Technology="THICK FILM", Termination=SMD/SMT, Tolerance=5%, Width=0.02inch
R2 R11: library part CMP-2002-07353-1, Manufacturer="Yageo / Phycomp", Part Number=RC0402FR-0710KL
R3 R16: library part CMP-1011-00510-4, "Chip Resistor, 1 KOhm, +/- 1%, 100 mW, -55 to 155 degC, 0402 (1005 Metric), RoHS, Tape and Reel", Case Code (Imperial)=0402, Case Code (Metric)=1005, Manufacturer="Basic Passives", Max Operating Temperature="155 degC", Min Operating Temperature="-55 degC", Package Quantity=10000, PartNumber=ERJ-2RKF1001X, Power Rating="100 mW", Resistance="1 KOhm", Tolerance=1%, Voltage Rating="50 V", Case\/Package=0402, componentlink1description="Manufacturer URL", componentlink1url=http://www.panasonic.com/, componentlink2description=Datasheet, componentlink2url=http://industrial.panasonic.com/cdbs/www-data/pdf/RDA0000/AOA0000C86.pdf, DatasheetVersion=04/2015, Height="0.35 mm", Length="1 mm", Mount="Surface Mount", Mounting Technology="Surface Mount", PackageDescription="2-Pin Surface Mount Device, Body 1 x 0.5 mm", PackageReference=0402, packaging="Tape and Reel", Pins=2, Radiation Hardening=No, REACH SVHC=Yes, RoHSCompliant=true, Width="0.5 mm"
R4: library part "RES SMD 10 OHM 1% 1/4W 0603", "Res Surge Chip Thick Film 0603 10 Ohm 1% 1/4W ±200ppm/°C Molded Paper T/R", Manufacturer=Yageo, Manufacturer Part Number=SR0603FR-7T10RL, Supplier Part Number 1=YAG5824CT-ND, CATEGORY="Chip SMD Resistors", componentlink1description=http://www.yageo.com/documents/recent/PYu-SR_D_F%20tol_RoHS_L_3.pdf?src-supplier=Digi-Key, componentlink1url=http://www.yageo.com/documents/recent/PYu-SR_D_F%20tol_RoHS_L_3.pdf?src-supplier=Digi-Key, Pricing 1="1=0.75000, 10=0.55100, 100=0.32080, 1000=0.17992, 2500=0.17370 (USD)", RoHS=Yes, RoHS Compliant=Yes, Stock 1=13323, Supplier 1=Digi-Key
R12 R13 R14 R15: library part CMP-2002-06457-1, Manufacturer=Panasonic, Part Number=ERJ-U020R00X
TP1 TP4 TP5 TP6 TP7 TP8 TP9 TP10 TP11: library part TP_1MM, "Test Point 1MM diameter"
U1: library part "IC NEO-M9N-00B", "GNSS module, Flash, TCXO, SAW, LNA, LCC, 12x16 mm Professional Grade", Manufacturer=u-blox, Supplier Part Number 1=672-NEO-M9N-00BCT-ND, CATEGORY="RF Receivers, Transceivers", Manufacturer Part Number=NEO-M9N-00B, Pricing 1="1=27.00000, 10=23.92000, 50=19.61000, 100=15.68010 (USD)", RoHS=Yes, RoHS Compliant=Yes, Stock 1=250, Supplier 1=Digi-Key

## Via types
v1: diameter 0.406, hole 0.254, L01-Top Layer to L04-Bottom Layer, tented both sides, 304 vias
v2: diameter 5.5/5.5/5.5/6 (per signal layer), hole 3.5, L01-Top Layer to L04-Bottom Layer, 1 vias

## Nets (pads, with @x,y where several pads share a name; then routed paths per layer and width w, separated by ;. In a path a pad name is that pad's centre, name@x,y a point inside that pad or via, vN(x,y) a via of type N, cw(c..) or ccw(c..) an arc to the next point about the centre after c; other vN are vias at no path point)
+3V3: C1.2 C2.2 C3.2 C6.1 C7.1 J1.2 J1.4 J1.70 J1.72 J1.74 LED2.1 Q1.2 R2.2 R6.2 R11.2 R16.2 U1.22 U1.23 | length 15.4
  L01-Top Layer w0.254: R16.2 8.559,11.893 10.193,11.893 v1(10.2,11.9) R11.2 ; v1(11.2,7.7) 11.2,8.679 cw(c11.371,8.679) LED2.1 ; v1(11.7,12.1) R2.2 ; Q1.2 13.215,36.515 v1(13.5,36.8) ; R6.2 14.15,36.1 14.273,36.223 14.273,36.573 v1(14.5,36.8)
  L04-Bottom Layer w0.254: J1.74 2.006,3 ; J1.72 2.506,3.203 ; J1.70 3.006,3.18 ; J1.4 19.506,3.179 ; 19.97,3.42 20.006,3.42 J1.2
  other v1: 3.3,3.1 3.3,3.8 20.411,4 21.1,4 3.288,4.517 21.1,4.787 20.346,4.826 3.3,5.165 15.9,13.937 15.9,14.55 15.9,15.2
D_SEL: R10.2 TP1.1 U1.2 | length 4.8
  L01-Top Layer w0.254: U1.2 16.799,31.894 cw(c17.053,31.894) 16.873,32.073 TP1.1 cw(c17.254,32.188) 17.073,32.367 18.132,33.426 cw(c18.311,33.246) 18.311,33.5 R10.2
EXTIN: TP5.1 U1.4 | length 2.9
  L01-Top Layer w0.254: U1.4 14.6,32.098 15,32.498 TP5.1
GND: C1.1 C2.1 C3.1 C5.1 C6.2 C7.2 J1.3 J1.5 J1.11 J1.21 J1.27 J1.33 J1.39 J1.45 J1.51 J1.57 J1.71 J1.73 J1.75 J2.2 J2.3 Q2.2 R1.2 R3.1 R9.2 R10.1 U1.10 U1.12 U1.13 U1.24 | length 34
  L01-Top Layer w0.254: J1.75 1.75,2.7 ; J1.73 2.25,2.9 ; J1.71@2.7,1.275 J1.71 2.75,2.9 ; J1.57 6.25,2.589 6.3,2.639 v1(6.3,3.8) ; v1(6.947,12.104) 6.95,12.108 Q2.2 ; C5.1 v1(7.9,36) ; J1.51 7.75,3.4 ; J1.45 9.25,3.35 v1(9.3,3.4) ; R1.2 v1(9.5,33.4) ; v1(10.6,10.6) R3.1@11.5,10.6 ; J1.39 10.75,3.109 11.1,3.459 v1(11.1,3.5) ; J1.33 12.25,3.45 v1(12.3,3.5) ; v1(13.7,3.6) 13.75,3.55 J1.27 ; v1(15.2,3.6) 15.25,3.55 J1.21 ; R9.2 v1(17.7,34) ; v1(17.6,4.4) 17.6,4.359 17.75,4.209 J1.11 ; R10.1 v1(19,35.4) ; J1.5 19.25,2.738 19.3,2.788 v1(19.3,3.7) ; J1.3 19.75,3.3
  other v1: 7.3,3.8 0.64,4.197 1.279,4.2 19.587,4.469 0.683,5.031 1.5,5.031 19.619,5.117 1.552,5.97 21.2,6.1 20.311,6.2 1.171,6.732 1.933,6.732 21.134,7.1 1.552,7.494 20,7.835 20.779,7.901 1.171,8.256 1.933,8.256 19.9,9 1.552,9.018 1.171,9.78 1.933,9.78 19.9,10.1 1.552,10.542 1.171,11.304 1.933,11.304 19.8,11.7 1.552,12.066 19.8,12.6 1.171,12.828 1.933,12.828 1.552,13.59 18.8,13.6 1.171,14.352 1.933,14.352 20.221,14.352 18.8,14.8 1.552,15.114 1.171,15.876 1.933,15.876 20.221,15.876 18.8,16 3.901,16.02 1.552,16.638 1.171,17.4 1.933,17.4 20.221,17.4 1.552,18.162 1.171,18.924 1.933,18.924 20.8,19.3 1.552,19.686 1.171,20.448 1.933,20.448 1.552,21.21 20.6,21.5 1.171,21.972 1.933,21.972 1.552,22.734 1.171,23.496 1.933,23.496 20.5,23.9 1.552,24.258 1.171,25.02 1.933,25.02 1.552,25.782 20.6,25.9 1.171,26.544 1.933,26.544 2.695,26.544 3.457,26.544 4.219,26.544 6.505,26.544 7.267,26.544 8.029,26.544 8.791,26.544 20.6,26.8 1.552,27.306 2.314,27.306 3.076,27.306 3.838,27.306 4.6,27.306 6.886,27.306 7.648,27.306 8.41,27.306 9.172,27.306 20.6,27.6 1.171,28.068 1.933,28.068 2.695,28.068 3.457,28.068 4.219,28.068 4.981,28.068 5.743,28.068 8.029,28.068 8.791,28.068 9.553,28.068 1.552,28.83 2.314,28.83 3.076,28.83 9.172,28.83 1.171,29.592 1.933,29.592 2.695,29.592 9.553,29.592 1.552,30.354 2.314,30.354 3.076,30.354 9.172,30.354 1.171,31.116 1.933,31.116 2.695,31.116 9.553,31.116 5.6,31.41 3.6,31.48 4.341,31.46 6.442,31.46 1.552,31.878 2.314,31.878 3.076,31.878 6.886,31.878 7.648,31.878 5.458,32.009 3.865,32.042 5.024,32.58 1.171,32.64 1.933,32.64 2.695,32.64 5.743,32.64 6.505,32.64 7.267,32.64 8.029,32.64 8.791,32.64 3.508,32.68 4.723,33.206 3.158,33.28 1.552,33.402 2.314,33.402 6.124,33.402 6.886,33.402 7.648,33.402 8.41,33.402 4.689,33.823 3.215,33.981 1.171,34.164 1.933,34.164 8.791,34.164 9.553,34.164 10.315,34.164 4.665,34.453 3.172,34.7 1.552,34.926 2.314,34.926 4.627,35.097 3.149,35.319 1.171,35.688 1.933,35.688 3.091,35.98 1.552,36.45 2.314,36.45 8.41,36.45 9.172,36.45 9.934,36.45 10.696,36.45 2.915,36.58 4.196,36.771 2.805,37.192 1.171,37.212 1.933,37.212 4.981,37.212 5.743,37.212 6.505,37.212 7.267,37.212 8.029,37.212 8.791,37.212 9.553,37.212 10.315,37.212 11.077,37.212 3.982,37.382 2.452,37.75 4.378,37.947 1.552,37.974 5.362,37.974 6.124,37.974 6.886,37.974 7.648,37.974 8.41,37.974 9.172,37.974 9.934,37.974 10.696,37.974 2.3,38.375 6.505,38.736 7.267,38.736 8.029,38.736 8.791,38.736 9.553,38.736 12.601,38.736 13.363,38.736 14.125,38.736 14.887,38.736 15.649,38.736 16.411,38.736 17.173,38.736 17.935,38.736 18.697,38.736 19.459,38.736 20.221,38.736 20.983,38.736 3.3,39.348 4.1,39.348 6.2,39.4 0.9,39.5 6.886,39.498 7.648,39.498 8.41,39.498 13.744,39.498 14.506,39.498 15.268,39.498 16.03,39.498 16.792,39.498 17.554,39.498 18.316,39.498 19.078,39.498 19.84,39.498 20.602,39.498 21.364,39.498 3.457,40.26 6.505,40.26 7.267,40.26 8.029,40.26 14.125,40.26 14.887,40.26 15.649,40.26 16.411,40.26 17.173,40.26 17.935,40.26 18.697,40.26 19.459,40.26 20.221,40.26 20.983,40.26 0.9,40.8 3.076,41.022 3.838,41.022 6.886,41.022 7.648,41.022 14.506,41.022 15.268,41.022 16.03,41.022 16.792,41.022 17.554,41.022 18.316,41.022 19.078,41.022 19.84,41.022 20.602,41.022 21.364,41.022
  other v2: 11,42
LNA_EN: R7.1 TP6.1 U1.14 | length 32.9
  L01-Top Layer w0.254: v1@5.001,16.101 U1.14 ; R7.1 TP6.1 v1(18.1,37.5)
  L04-Bottom Layer w0.254: v1(5,16.1) 5,21.5 10.2,26.7 10.2,32.6 13,35.4 16,35.4 v1(18.1,37.5)
NetC5_2: C5.2 L1.1 R4.2 | length 2.9
  L01-Top Layer w0.191: L1.1@4.7,36 C5.2 6,34.521 cw(c5.829,34.521) R4.2
NetJ1_35: J1.35 R14.1 | length 26.7
  L01-Top Layer w0.191: R14.1 3.1,12.3 v1(4,11.4) ; J1.35 11.75,4.579 cw(c11.921,4.579) v1(11.8,4.7)
  L04-Bottom Layer w0.191: v1(4,11.4) cw(c4.241,11.4) 4.071,11.571 5.817,13.317 ; 5.817,13.317 cw(c6.5,12.634) 6.5,13.6 ccw(c6.5,15.892) 7.814,14.014 ccw(c6.5,15.892) 8.121,14.271 8.453,14.604 cw(c9.928,12.536) 9.928,15.076 11.955,15.076 cw(c11.955,13.943) 12.756,14.744 cw(c10.96,12.948) 13.5,12.948 13.5,6.414 cw(c11.776,6.414) 12.995,5.195 cw(c11.8,6.39) v1(11.8,4.7)
NetJ1_46: J1.46 R15.1 | length 13.6
  L01-Top Layer w0.191: R15.1 4.2,12.3 v1(5,11.5)
  L04-Bottom Layer w0.191: v1(5,11.5) 5.684,10.816 ccw(c6.934,12.065) 6.215,10.451 cw(c6.215,8.678) 6.944,10.294 cw(c6.215,8.678) 7.468,9.932 8.228,9.172 cw(c6.771,7.716) 8.831,7.716 8.831,2.87 ccw(c9.021,2.87) 8.876,2.747 cw(c8.561,2.432) 9.006,2.432 J1.46
NetJ1_50: J1.50 R13.2 | length 5
  L01-Top Layer w0.191: v1(8,4.9) R13.2
  L04-Bottom Layer w0.191: J1.50@8.003,1.528 v1@8.003,4.897
  L04-Bottom Layer w0.203: v1(8,4.9) v1@8.003,4.897 ; J1.50@8.003,1.528 J1.50
NetJ1_67: J1.67 R12.2 | length 5.2
  L01-Top Layer w0.191: J1.67 3.75,5.35 3.8,5.4 R12.2
NetLED1_1: LED1.1 R16.1 | length 1.1
  L01-Top Layer w0.191: LED1.1 8.552,13.84 R16.1
NetLED1_2: LED1.2 Q2.3 | length 2.6
  L01-Top Layer w0.191: Q2.3 6.3,15.022 6.367,15.089 7.106,15.089 7.371,15.354 LED1.2
NetLED2_2: LED2.2 R3.2 | length 1.9
  L01-Top Layer w0.191: R3.2@12.5,10.6 12.5,9.404 ccw(c13.354,9.404) LED2.2
NetQ1_1: Q1.1 R6.1 R7.2 R9.1 | length 6.4
  L01-Top Layer w0.254: Q1.1 13.635,34.685 14.05,35.1 14.556,35.1 ccw(c14.556,35.354) 14.735,35.174 15.487,35.926 cw(c15.666,35.746) 15.666,36 15.877,36 16,35.95 R9.1
NetQ1_3: Q1.3 R4.1 | length 3.2
  L01-Top Layer w0.191: R4.1 8.2,34.4 9.279,35.479 10.079,35.479 Q1.3
RF_ANT: C4.1 J2.1 L1.2 | length 3.7
  L01-Top Layer w0.191: J2.1 3.4,37.207 ccw(c5.107,37.207) 3.9,36 C4.1
RF_MODULE: C4.2 U1.11 | length 4.1
  L01-Top Layer w0.191: C4.2 3.9,33.649 ccw(c5.949,33.649) 4.5,32.2 cw(c3.291,30.991) 5.001,30.991 U1.11
RST_GPS: R12.1 R13.1 U1.8 | length 33.9
  L01-Top Layer w0.254: R12.1 v1(3.8,8.4) ; v1(7.8,8.6) 8,8.4 R13.1 ; U1.8 v1(8.3,31.7)
  L04-Bottom Layer w0.254: v1(7.8,8.6) 4.041,8.6 3.841,8.4 v1(3.8,8.4) 3.7,8.4 3.2,8.9 3.2,24.5 8.3,29.6 v1(8.3,31.7)
RX_GPS: R5.1 TP10.1 U1.21 | length 21.3
  L01-Top Layer w0.191: R5.1 6.6,9.2 7.2,9.8 8.248,9.8 11.405,6.644 12.544,6.644 13.8,7.9 13.8,14.589 14.5,15.289 TP10.1 14.5,17.701 U1.21
RX_GPS_CONN: J1.62 R5.2 | length 5.5
  L01-Top Layer w0.191: v1(5.6,4.5) 6.6,5.5 R5.2
  L04-Bottom Layer w0.191: J1.62 5.006,3.906 v1(5.6,4.5)
SAFEBOOT_N: TP7.1 U1.1 | length 2.2
  L01-Top Layer w0.254: U1.1 17.999,30.1 TP7.1
SCL: J1.40 R2.1 U1.19 | length 18.2
  L01-Top Layer w0.191: U1.19 12.4,16.1 11.7,15.4 R2.1 v1(12.5,13.675)
  L04-Bottom Layer w0.191: J1.40 10.506,4.306 12.5,6.3 v1(12.5,13.675)
SCL: TP9.1
SDA: J1.42 R11.1 U1.18 | length 17.8
  L01-Top Layer w0.191: v1(9.4,13.675) R11.1 10.2,15.5 11.3,16.6 U1.18
  L04-Bottom Layer w0.191: v1(9.4,13.675) 9.4,7 10.006,6.394 J1.42
SDA: TP8.1
TP1: Q2.1 R14.2 R15.2 U1.3 | length 33
  L01-Top Layer w0.191: v1(3.9,14.7) ccw(c3.9,13.976) 3.388,14.488 3.3,14.4 ccw(c3.783,13.917) 3.1,13.917 R14.2 R15.2 5.569,13.725 5.65,13.644 Q2.1
  L01-Top Layer w0.254: U1.3 15.699,31.999 v1(15.9,32.2)
  L04-Bottom Layer w0.191: v1(3.9,14.7) 4.748,14.7 ccw(c4.748,17.24) 6.544,15.444 10.556,19.456 ccw(c8.76,21.252) 11.231,20.665 ccw(c8.76,21.252) 11.3,21.252 11.3,31.044 cw(c13.155,31.044) 11.843,32.356 cw(c13.639,30.56) 13.639,33.1 13.948,33.1 cw(c13.948,30.56) 15.744,32.356 v1(15.9,32.2)
TX_GPS: R8.1 TP11.1 U1.20 | length 17.4
  L01-Top Layer w0.191: R8.1 5.2,10.3 6.2,11.3 12.2,11.3 13.2,12.3 TP11.1 13.2,15.619 13.5,15.919 U1.20
TX_GPS_CONN: J1.64 R8.2 | length 5.2
  L01-Top Layer w0.191: v1(4.5,4.9) 5.2,5.6 R8.2
  L04-Bottom Layer w0.191: J1.64@4.503,1.528 v1@4.503,4.897
  L04-Bottom Layer w0.203: v1(4.5,4.9) v1@4.503,4.897 ; J1.64@4.503,1.528 J1.64
USB_DM: J1.9 U1.5 | length 37.7
  L01-Top Layer w0.241: v1@13.159,31.762 13.159,31.051 13.22,30.99 13.22,30.279 U1.5 ; v1(18.103,6.4) 18.186,6.317 18.186,6.183 18.29,6.078 18.29,1.373 cw(c18.152,1.373) J1.9
  L04-Bottom Layer w0.241: v1(13.253,31.9) ccw(c13.329,31.824) 13.221,31.824 13.221,31.719 cw(c13.115,31.719) 13.19,31.645 ccw(c13.265,31.57) 13.159,31.57 13.159,25.7 13.159,22.232 13.19,22.232 13.19,21.737 13.159,21.737 13.159,21.242 13.48,21.242 13.48,20.747 13.159,20.747 13.159,20.251 13.48,20.251 13.48,19.756 13.159,19.756 13.159,19.14 13.159,17.188 ccw(c15.688,17.188) 13.9,15.4 14.554,14.746 cw(c12.467,12.658) 15.419,12.658 15.419,7.7 ccw(c16.189,7.7) 15.645,7.155 16.953,5.847 ccw(c17.55,6.445) 17.55,5.6 17.759,5.6 ccw(c17.759,5.941) 18,5.7 ccw(c17.751,5.949) 18.103,5.949 v1(18.103,6.4)
USB_DP: J1.7 U1.6 | length 37.7
  L01-Top Layer w0.241: U1.6 12.679,30.279 12.679,30.99 12.74,31.051 v1@12.74,31.762 ; v1(18.71,6.4) 18.71,1.373 ccw(c18.848,1.373) J1.7
  L04-Bottom Layer w0.241: v1(12.647,31.9) cw(c12.57,31.824) 12.678,31.824 12.678,31.719 ccw(c12.784,31.719) 12.709,31.645 cw(c12.634,31.57) 12.74,31.57 12.74,17.187 ccw(c15.684,17.187) 13.603,15.105 14.256,14.451 cw(c12.46,12.655) 15,12.655 15,7.697 ccw(c16.183,7.697) 15.346,6.861 16.904,5.304 ccw(c17.2,5.6) 17.2,5.181 17.76,5.181 ccw(c17.76,5.939) 18.296,5.403 18.298,5.405 ccw(c17.304,6.399) v1(18.71,6.4)
VDD_USB: R1.1 TP4.1 U1.7 | length 3.8
  L01-Top Layer w0.191: R1.1@10.7,32.4 10.8,32.5 TP4.1 11.8,32.389 11.3,31.889 U1.7
pads on no net: J1.1 J1.6 J1.8 J1.10 J1.20 J1.22 J1.23 J1.24 J1.25 J1.26 J1.28 J1.29 J1.30 J1.31 J1.32 J1.34 J1.36 J1.37 J1.38 J1.41 J1.43 J1.44 J1.47 J1.48 J1.49 J1.52 J1.53 J1.54 J1.55 J1.56 J1.58 J1.59 J1.60 J1.61 J1.63 J1.65 J1.66 J1.68 J1.69 U1.9 U1.15 U1.16 U1.17

## Polygon pours and split planes (outlines as drawn)
GND on L01-Top Layer "NONET_L-01_P-001" (solid, remove dead copper, pour order 7): 0,42 22,42 22,3.15 0,3.15
GND on L01-Top Layer "L01-Top Layer-GND" (solid, pour order 8): 4.11,39.407 4.288,39.288 4.407,39.11 4.449,38.9 4.449,37.85 4.407,37.64 4.288,37.462 4.11,37.343 4.052,37.331 4.052,37.207 4.052,37.206 4.072,37.001 4.132,36.803 4.139,36.791 4.31,36.757 4.488,36.638 4.607,36.46 4.649,36.25 4.649,35.75 4.607,35.54 4.552,35.457 4.552,35.417 4.657,35.26 4.699,35.05 4.699,34.55 4.657,34.34 4.538,34.162 4.36,34.043 4.15,34.001 3.65,34.001 3.44,34.043 3.262,34.162 3.143,34.34 3.101,34.55 3.101,35.05 3.143,35.26 3.248,35.417 3.248,35.457 3.193,35.54 3.151,35.75 3.151,35.901 3.117,35.942 2.95,36.255 2.934,36.307 2.909,36.355 2.805,36.694 2.8,36.748 2.784,36.8 2.75,37.153 2.752,37.18 2.747,37.207 2.748,37.211 2.748,37.331 2.69,37.343 2.512,37.462 2.393,37.64 2.351,37.85 2.351,38.9 2.393,39.11 2.512,39.288 2.69,39.407 2.9,39.449 3.9,39.449
+3V3 on L01-Top Layer "NONET_L-01_P-001" (solid, remove dead copper, pour order 4): 17.1,17.569 17.1,13.35 16.5,13.35 16.5,8.2 14.4,8.2 14.4,13.8 15.299,13.8 15.299,17.569
GND on L01-Top Layer "NONET_L-01_P-001" (solid, remove dead copper, pour order 2): 19.006,3.1 19.006,4.9 20.3,4.9 20.3,3.1
GND on L01-Top Layer "NONET_L-01_P-001" (solid, remove dead copper, pour order 0): 1.5,2.5 3.1,2.5 3.1,5.1 0.3,5.1 0.3,3.8 1.5,3.8
+3V3 on L04-Bottom Layer "NONET_L-01_P-001" (solid, remove dead copper, pour order 3): 21.5,5.183 21.5,3.6 20.5,3.6 20.5,3.1 19.366,3.1 19.366,5.183
GND on L04-Bottom Layer "NONET_L-01_P-001" (solid, remove dead copper, pour order 9): 0,42 0,3.439 22,3.439 22,42 19.13,42
+3V3 on L04-Bottom Layer "NONET_L-01_P-001" (solid, remove dead copper, pour order 1): 3.6,5.5 2.26,5.5 2.26,3.3 1.9,3.3 1.9,2.8 3.6,2.8 3.6,3.1
GND on L02-Inner Layer "NONET_L-01_P-001" (solid, remove dead copper, pour order 5): 0,41.915 22,41.915 22,2.996 0,2.996
+3V3 on L03-Inner Layer "NONET_L-01_P-001" (solid, remove dead copper, pour order 6): 21.5,37.8 21.5,3.4 2.7,3.4 2.7,25.9 11.8,25.9 11.8,37.8

## Keep-outs
Keep-Out Layer:
  lines w0.013: 60.428,-36.104 ccw(c60.427,-35.085) 61.446,-35.085

## Silkscreen, mask and mechanical layers (free items; w line width, h text height)
Top Overlay:
  drawing of 17 lines, arcs and shapes, not listed
  text ".revision" at 21.156,25.4 h2 r90
  text "NETWORK" at 2.084,22.664 h2 r90
  text "SHIWA" at 2.085,16.272 h2 r90
  text ".Pcb_File_Name_No_Path" at 21.16,8.3 h2 r90
  text "B Key" at 15.387,4.067 h1.6
Bottom Overlay:
  drawing of 4 lines, arcs and shapes, not listed
  text "SHIWA" at 5.221,33.7 h4 r90
  text ".TENSH" at 20.75,32.5 h4 r90
  text "SN:" at 16.7,31.8 h4 r90
  text "NETWORK" at 5.468,20.6 h4 r90
Mechanical 9:
  the board outline again, w0.102
OUTLINE:
  the board outline again, w0.1
INFO:
  drawing of 295 lines, arcs and shapes, not listed
  text "Layer" at 1.778,87.79 h1.52
  text "Name" at 12.19,87.79 h1.52
  text "Material" at 38.852,87.79 h1.52
  text "Thickness" at 60.69,87.79 h1.52
  text "Constant" at 77.196,87.79 h1.52
  text "Board Layer Stack" at 91.671,87.79 h1.52
  text "Top Overlay" at 12.19,84.742 h1.52
  text "Top Solder" at 12.19,81.694 h1.52
  text "Solder Resist" at 38.852,81.694 h1.52
  text "0.015mm" at 60.69,81.694 h1.52
  text "3.9" at 77.196,81.694 h1.52
  text "1" at 1.778,78.646 h1.52
  text "L01-Top Layer" at 12.19,78.646 h1.52
  text "0.035mm" at 60.69,78.646 h1.52
  text "Dielectric 1" at 12.19,75.598 h1.52
  text "2116" at 38.852,75.598 h1.52
  text "0.110mm" at 60.69,75.598 h1.52
  text "3.7" at 77.196,75.598 h1.52
  text "2" at 1.778,72.55 h1.52
  text "L02-Inner Layer" at 12.19,72.55 h1.52
  text "0.035mm" at 60.69,72.55 h1.52
  text "Dielectric 2" at 12.19,69.502 h1.52
  text "FR4" at 38.852,69.502 h1.52
  text "0.400mm" at 60.69,69.502 h1.52
  text "4.04" at 77.196,69.502 h1.52
  text "3" at 1.778,66.454 h1.52
  text "L03-Inner Layer" at 12.19,66.454 h1.52
  text "0.035mm" at 60.69,66.454 h1.52
  text "Dielectric 3" at 12.19,63.406 h1.52
  text "2116" at 38.852,63.406 h1.52
  text "0.110mm" at 60.69,63.406 h1.52
  text "3.7" at 77.196,63.406 h1.52
  text "4" at 1.778,60.358 h1.52
  text "L04-Bottom Layer" at 12.19,60.358 h1.52
  text "0.035mm" at 60.69,60.358 h1.52
  text "Bottom Solder" at 12.19,57.31 h1.52
  text "Solder Resist" at 38.852,57.31 h1.52
  text "0.015mm" at 60.69,57.31 h1.52
  text "3.9" at 77.196,57.31 h1.52
  text "Bottom Overlay" at 12.19,54.262 h1.52

## Dimensions
1.075,0 to 20.925,0 on Bottom Courtyard
1.075,0 to 0,42 on Bottom Courtyard
0,3.15 to 22,3.15 on Bottom Courtyard

## Text inside footprints (layer, text, board x,y; h text height)
J1: Top Overlay "75" at 1.5,2.5 h2; Top Overlay "1" at 20,2.5 h2; Top Overlay "21" at 14.001,2.5 h2; Top Overlay "11" at 18,2.5 h2; Bottom Overlay "2" at 20.499,3 h2; Bottom Overlay "74" at 3,3 h2; Bottom Overlay "20" at 15.499,3 h2; Bottom Overlay "10" at 18.71,3.024 h2